# EAGLE board lh (EAGLE 6.4)
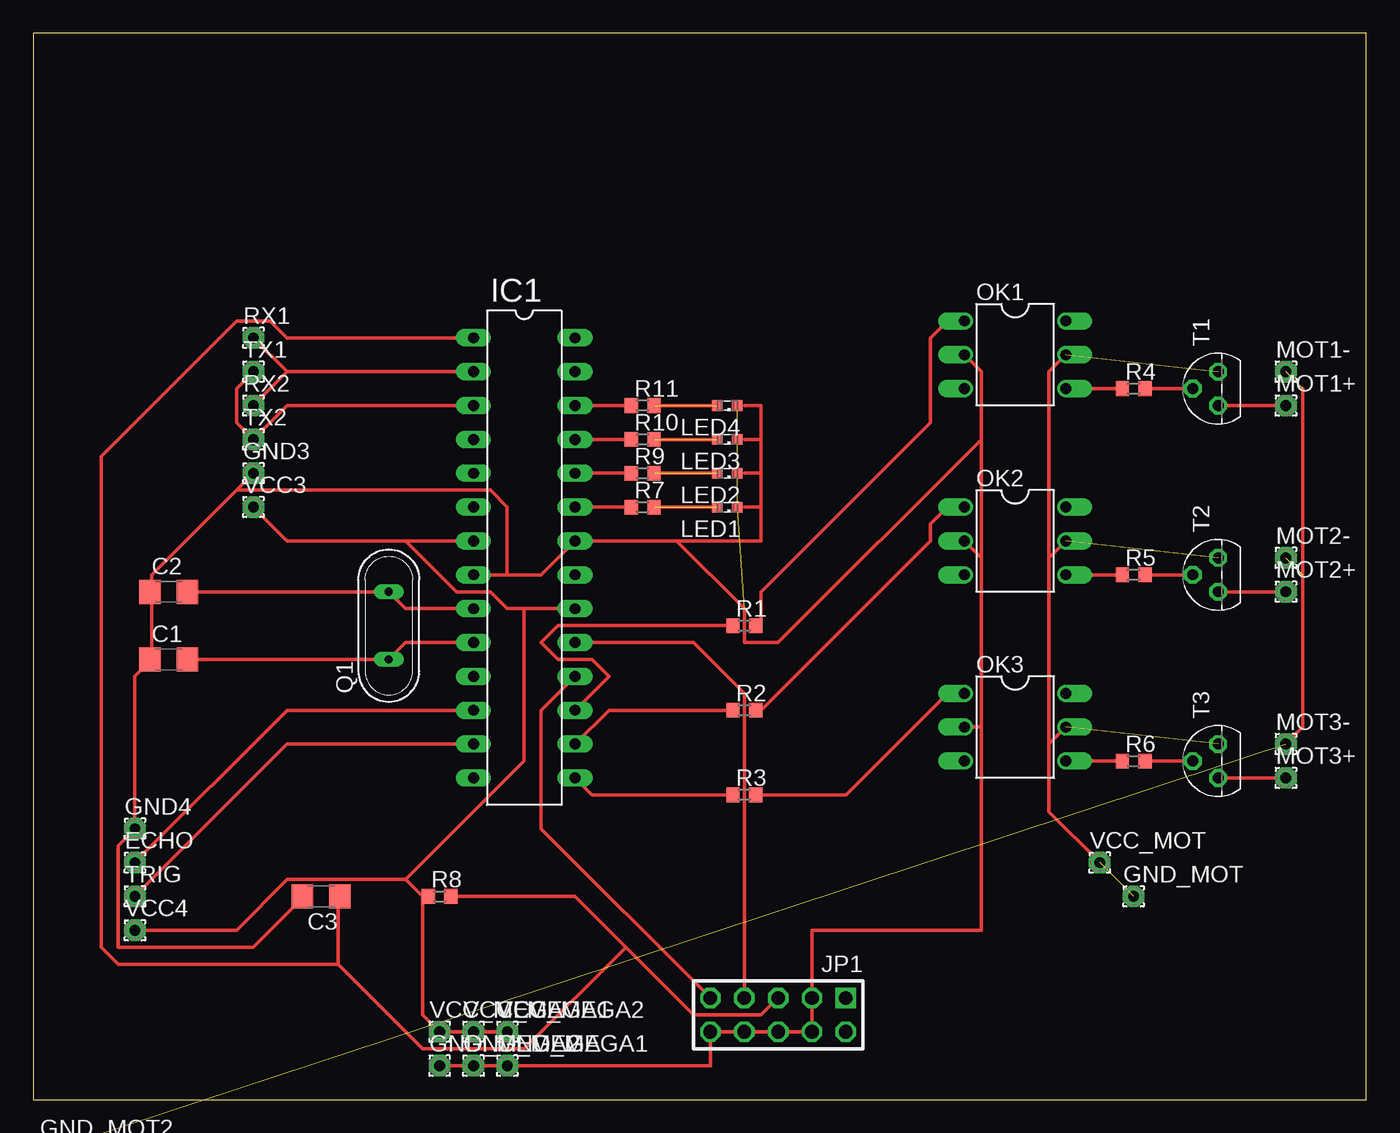
[diagram p0: board, top side]

Size 100 x 80 mm. Coordinates in mm from the lower left corner, seen from the top.
Outline: 0,0 100,0 100,80 0,80 0,0
Copper layers (1*16): Top 0.035mm / dielectric 1.5mm / Bottom 0.035mm
Design rules "default": minimum track width 10mil, minimum drill 24mil, track to track 8mil, track to pad 8mil, pad to pad 8mil, via to via 8mil, smd to smd 8mil, copper to edge 40mil, drill to drill 8mil, minimum pad ring 10mil, minimum via ring 8mil, stop-mask expansion 4mil, vias tented up to drill 0mil, thermal gap 10mil

## Footprints (pad centres in the part's own frame; a part is rotated, then mirrored left to right if it is on the bottom)
C1206 = smd 1.6 x 1.8: 1 -1.4,0; 2 1.4,0
1,6/0,8 = drill 0.813 pad 1.6 octagon: 1 0,0
DIL28-3 = drill 0.813 long: 1 -16.51,-3.81; 2 -13.97,-3.81; 3 -11.43,-3.81; 4 -8.89,-3.81; 5 -6.35,-3.81; 6 -3.81,-3.81; 7 -1.27,-3.81; 8 1.27,-3.81; 9 3.81,-3.81; 10 6.35,-3.81; 11 8.89,-3.81; 12 11.43,-3.81; 13 13.97,-3.81; 14 16.51,-3.81; 15 16.51,3.81; 16 13.97,3.81; 17 11.43,3.81; 18 8.89,3.81; 19 6.35,3.81; 20 3.81,3.81; 21 1.27,3.81; 22 -1.27,3.81; 23 -3.81,3.81; 24 -6.35,3.81; 25 -8.89,3.81; 26 -11.43,3.81; 27 -13.97,3.81; 28 -16.51,3.81
AVR-ISP-10 = drill 1.016 square: 1 -5.08,-1.27 | drill 1.016 octagon: 2 -5.08,1.27; 3 -2.54,-1.27; 4 -2.54,1.27; 5 0,-1.27; 6 0,1.27; 7 2.54,-1.27; 8 2.54,1.27; 9 5.08,-1.27; 10 5.08,1.27
SML0603 = smd 0.8 x 0.8: A 0.75,0; C -0.75,0
DIL06 = drill 0.813 offset: 1 -2.54,-3.81; 2 0,-3.81; 3 2.54,-3.81; 4 2.54,3.81; 5 0,3.81; 6 -2.54,3.81
QS = drill 0.61 long: 1 -2.54,0; 2 2.54,0
R0603 = smd 1 x 1.1: 1 -0.85,0; 2 0.85,0
TO92 = drill 0.813 octagon: 1 1.27,0; 2 0,1.905; 3 -1.27,0

## Placement (x,y rotation side)
C1  [C1206]  10.16,33.02 0 top
C2  [C1206]  10.16,38.1 0 top
C3  [C1206]  21.59,15.24 180 top
ECHO  [1,6/0,8]  7.62,17.78 0 top
GND3  [1,6/0,8]  16.51,46.99 0 top
GND4  [1,6/0,8]  7.62,20.32 0 top
GND_MEGA  [1,6/0,8]  33.02,2.54 0 top
GND_MEGA1  [1,6/0,8]  35.56,2.54 0 top
GND_MEGA2  [1,6/0,8]  30.48,2.54 0 top
GND_MOT  [1,6/0,8]  82.55,15.24 0 top
GND_MOT2  [1,6/0,8]  1.27,-3.81 0 top  (outside the outline)
GND_MOT3  [1,6/0,8]  1.27,-7.62 0 top  (outside the outline)
GND_MOT4  [1,6/0,8]  1.27,-11.43 0 top  (outside the outline)
IC1  MEGA8-P  [DIL28-3]  36.83,40.64 270 top
JP1  AVR-ISP-10  [AVR-ISP-10]  55.88,6.35 180 top
LED1  [SML0603]  52.07,44.45 180 top
LED2  [SML0603]  52.07,46.99 180 top
LED3  [SML0603]  52.07,49.53 180 top
LED4  [SML0603]  52.07,52.07 180 top
MOT1+  [1,6/0,8]  93.98,52.07 0 top
MOT1-  [1,6/0,8]  93.98,54.61 0 top
MOT2+  [1,6/0,8]  93.98,38.1 0 top
MOT2-  [1,6/0,8]  93.98,40.64 0 top
MOT3+  [1,6/0,8]  93.98,24.13 0 top
MOT3-  [1,6/0,8]  93.98,26.67 0 top
OK1  4N35  [DIL06]  73.66,55.88 270 top
OK2  4N35  [DIL06]  73.66,41.91 270 top
OK3  4N35  [DIL06]  73.66,27.94 270 top
Q1  [QS]  26.67,35.56 90 top
R1  200om  [R0603]  53.34,35.56 0 top
R2  200Om  [R0603]  53.34,29.21 0 top
R3  200Om  [R0603]  53.34,22.86 0 top
R4  1K  [R0603]  82.55,53.34 0 top
R5  1K  [R0603]  82.55,39.37 0 top
R6  1K  [R0603]  82.55,25.4 0 top
R7  [R0603]  45.72,44.45 0 top
R8  10K  [R0603]  30.48,15.24 0 top
R9  [R0603]  45.72,46.99 0 top
R10  [R0603]  45.72,49.53 0 top
R11  [R0603]  45.72,52.07 0 top
RX1  [1,6/0,8]  16.51,57.15 0 top
RX2  [1,6/0,8]  16.51,52.07 0 top
T1  2N3904  [TO92]  88.9,53.34 90 top
T2  2N3904  [TO92]  88.9,39.37 90 top
T3  2N3904  [TO92]  88.9,25.4 90 top
TRIG  [1,6/0,8]  7.62,15.24 0 top
TX1  [1,6/0,8]  16.51,54.61 0 top
TX2  [1,6/0,8]  16.51,49.53 0 top
VCC3  [1,6/0,8]  16.51,44.45 0 top
VCC4  [1,6/0,8]  7.62,12.7 0 top
VCC_MEGA  [1,6/0,8]  30.48,5.08 0 top
VCC_MEGA1  [1,6/0,8]  33.02,5.08 0 top
VCC_MEGA2  [1,6/0,8]  35.56,5.08 0 top
VCC_MOT  [1,6/0,8]  80.01,17.78 0 top

## Library data of the parts
C1-C3 = eagle-ltspice; SPICEMODEL: NONE; SPICEPREFIX: C
ECHO GND3 GND4 GND_MEGA GND_MEGA1 GND_MEGA2 GND_MOT GND_MOT2-GND_MOT4 MOT1+ MOT1- MOT2+ MOT2- MOT3+ MOT3- RX1 RX2 TRIG TX1 TX2 VCC3 VCC4 VCC_MEGA VCC_MEGA1 VCC_MEGA2 VCC_MOT = wirepad
IC1 = atmel; OC_FARNELL: unknown; OC_NEWARK: unknown
JP1 = avr-5
LED1-LED4 = led
OK1-OK3 = optocoupler; MF: FAIRCHILD SEMICONDUCTOR; MPN: 4N35; OC_FARNELL: 1328375; OC_NEWARK: 72K9946
Q1 = special
R1-R11 = rcl
T1-T3 = transistor

## Nets
MEGA_GND: C1.1 C2.1 C3.2 GND3.1 GND4.1 GND_MEGA1.1 GND_MEGA2.1 GND_MEGA.1 IC1.8 IC1.22 JP1.3 JP1.4 JP1.6 JP1.8 JP1.10 LED1.C LED2.C LED3.C LED4.C OK1.2 OK2.2 OK3.2
MEGA_VCC: IC1.7 IC1.20 R8.1 VCC3.1 VCC4.1 VCC_MEGA1.1 VCC_MEGA2.1 VCC_MEGA.1
MOTO_GND: GND_MOT2.1 GND_MOT3.1 GND_MOT4.1 MOT1-.1 MOT2-.1 MOT3-.1
MOTO_VCC: GND_MOT.1 OK1.5 OK2.5 OK3.5 T1.1 T2.1 T3.1 VCC_MOT.1
N$1: IC1.17 R1.1
N$2: IC1.16 R2.1
N$3: JP1.1
N$4: OK1.1 R1.2
N$5: OK2.1 R2.2
N$6: OK3.1 R3.2
N$7: OK1.4 R4.1
N$8: OK2.4 R5.1
N$9: OK3.4 R6.1
N$10: R6.2 T3.2
N$11: IC1.23 R7.1
N$13: MOT1+.1 T1.3
N$14: MOT2+.1 T2.3
N$15: MOT3+.1 T3.3
N$16: C2.2 IC1.9 Q1.2
N$17: C1.2 IC1.10 Q1.1
N$18: IC1.19 JP1.7
N$19: IC1.18 JP1.9
N$20: R4.2 T1.2
N$21: IC1.13 TRIG.1
N$22: ECHO.1 IC1.12
N$23: IC1.2 RX1.1 RX2.1
N$24: IC1.3 TX1.1 TX2.1
N$25: R5.2 T2.2
N$26: IC1.24 R9.1
N$27: IC1.25 R10.1
N$28: IC1.26 R11.1
N$30: C3.1 IC1.1 JP1.5 R8.2
N$31: LED1.A R7.2
N$32: LED2.A R9.2
N$33: LED3.A R10.2
N$34: LED4.A R11.2
N$36: IC1.15 R3.1

## Tracks (layer width: path | path; a pad name or v marks a point on that pad's centre or on a via)
MEGA_GND  (4 unrouted)
  Top 0.254: C3.2 20.32,15.24 16.51,11.43 6.35,11.43 6.35,19.05 GND4.1 7.62,31.75 8.89,33.02 | 35.56,39.37 38.1,39.37 IC1.22 48.26,41.91 | 35.56,39.37 IC1.8 | 8.89,38.1 8.89,33.02 | 15.24,45.72 8.89,39.37 8.89,38.1 | 15.24,45.72 GND3.1 | 8.89,38.1 C2.1 | 35.56,39.37 35.56,44.45 34.29,45.72 15.24,45.72 | 8.89,33.02 C1.1 | 71.12,40.64 71.12,27.94 | OK2.2 71.12,40.64 | OK1.2 71.12,54.61 71.12,49.53 | 71.12,40.64 71.12,49.53 | GND_MEGA2.1 GND_MEGA.1 GND_MEGA1.1 50.8,2.54 JP1.10 JP1.8 JP1.6 JP1.4 JP1.3 58.42,12.7 71.12,12.7 71.12,27.94 | 71.12,27.94 OK3.2 | 48.26,41.91 53.34,36.83 53.34,34.29 55.88,34.29 71.12,49.53 | 53.34,52.07 54.61,52.07 54.61,49.53 | 54.61,44.45 54.61,41.91 48.26,41.91 | 53.34,49.53 54.61,49.53 | 54.61,49.53 54.61,46.99 | 53.34,46.99 54.61,46.99 | 54.61,46.99 54.61,44.45 | 54.61,44.45 53.34,44.45
MEGA_VCC
  Top 0.254: 27.94,41.91 19.05,41.91 VCC3.1 | 27.94,41.91 IC1.7 | 36.83,36.83 35.56,36.83 34.29,38.1 31.75,38.1 27.94,41.91 | 36.83,36.83 IC1.20 | 29.21,15.24 29.21,6.35 VCC_MEGA.1 VCC_MEGA1.1 VCC_MEGA2.1 | VCC4.1 15.24,12.7 19.05,16.51 27.94,16.51 | 29.21,15.24 27.94,16.51 | 29.21,15.24 R8.1 | 36.83,36.83 36.83,25.4 27.94,16.51
MOTO_GND  (5 unrouted)
  Top 0.254: MOT3-.1 95.25,27.94 95.25,39.37 95.25,53.34
MOTO_VCC  (4 unrouted)
  Top 0.254: 76.2,26.67 OK3.5 | 76.2,26.67 76.2,21.59 VCC_MOT.1 | 76.2,40.64 OK2.5 | 76.2,26.67 76.2,40.64 | OK1.5 76.2,54.61 76.2,40.64
N$1
  Top 0.254: R1.1 39.37,35.56 38.1,34.29 39.37,33.02 41.91,33.02 43.18,31.75 IC1.17
N$2
  Top 0.254: R2.1 43.18,29.21 IC1.16
N$4
  Top 0.254: OK1.1 68.58,58.42 67.31,57.15 67.31,50.8 54.61,38.1 54.61,35.56 R1.2
N$5
  Top 0.254: OK2.1 68.58,44.45 67.31,43.18 67.31,41.91 54.61,29.21 R2.2
N$6
  Top 0.254: R3.2 60.96,22.86 68.58,30.48 OK3.1
N$7
  Top 0.254: OK1.4 R4.1
N$8
  Top 0.254: OK2.4 R5.1
N$9
  Top 0.254: OK3.4 R6.1
N$10
  Top 0.254: T3.2 R6.2
N$11
  Top 0.254: IC1.23 R7.1
N$12
  Top 0.254: 46.99,52.07 48.26,52.07 50.8,52.07
N$13
  Top 0.254: MOT1+.1 T1.3
N$14
  Top 0.254: MOT2+.1 T2.3
N$15
  Top 0.254: MOT3+.1 T3.3
N$16
  Top 0.254: 11.43,38.1 C2.2 Q1.2 27.94,36.83 IC1.9
N$17
  Top 0.254: 11.43,33.02 C1.2 Q1.1 27.94,34.29 IC1.10
N$18
  Top 0.254: IC1.19 49.53,34.29 53.34,30.48 JP1.7
N$19
  Top 0.254: IC1.18 38.1,29.21 38.1,20.32 JP1.9
N$20
  Top 0.254: T1.2 R4.2
N$21
  Top 0.254: IC1.13 19.05,26.67 TRIG.1
N$22
  Top 0.254: IC1.12 19.05,29.21 ECHO.1
N$23
  Top 0.254: 19.05,54.61 IC1.2 | RX1.1 19.05,54.61 | 19.05,54.61 RX2.1
N$24
  Top 0.254: IC1.3 19.05,52.07 TX2.1 15.24,50.8 15.24,53.34 TX1.1
N$25
  Top 0.254: T2.2 R5.2
N$26
  Top 0.254: IC1.24 R9.1
N$27
  Top 0.254: IC1.25 R10.1
N$28
  Top 0.254: IC1.26 R11.1
N$29
  Top 0.254: 46.99,49.53 50.8,49.53
N$30
  Top 0.254: R8.2 40.64,15.24 44.45,11.43 | 44.45,11.43 49.53,6.35 54.61,6.35 JP1.5 | 22.86,10.16 22.86,15.24 C3.1 | 22.86,10.16 29.21,3.81 36.83,3.81 44.45,11.43 | IC1.1 19.05,57.15 17.78,58.42 15.24,58.42 5.08,48.26 5.08,11.43 6.35,10.16 22.86,10.16
N$31  (1 unrouted)
N$32  (1 unrouted)
N$33  (1 unrouted)
N$34  (1 unrouted)
N$35
  Top 0.254: 50.8,46.99 46.99,46.99
N$36
  Top 0.254: R3.1 41.91,22.86 IC1.15
N$37
  Top 0.254: 46.99,44.45 50.8,44.45